# Altium PCB STM32_FFT.PcbDoc
Units mm, origin at the board's own origin, x right, y up, seen from the top; angles counter-clockwise.
Board outline 99.06 x 50.8 mm, 2 copper layers (Top Layer, Bottom Layer); 63 components, 49 nets, 246 pads, 64 vias.
Unrouted connection lines stored in the file: 2.
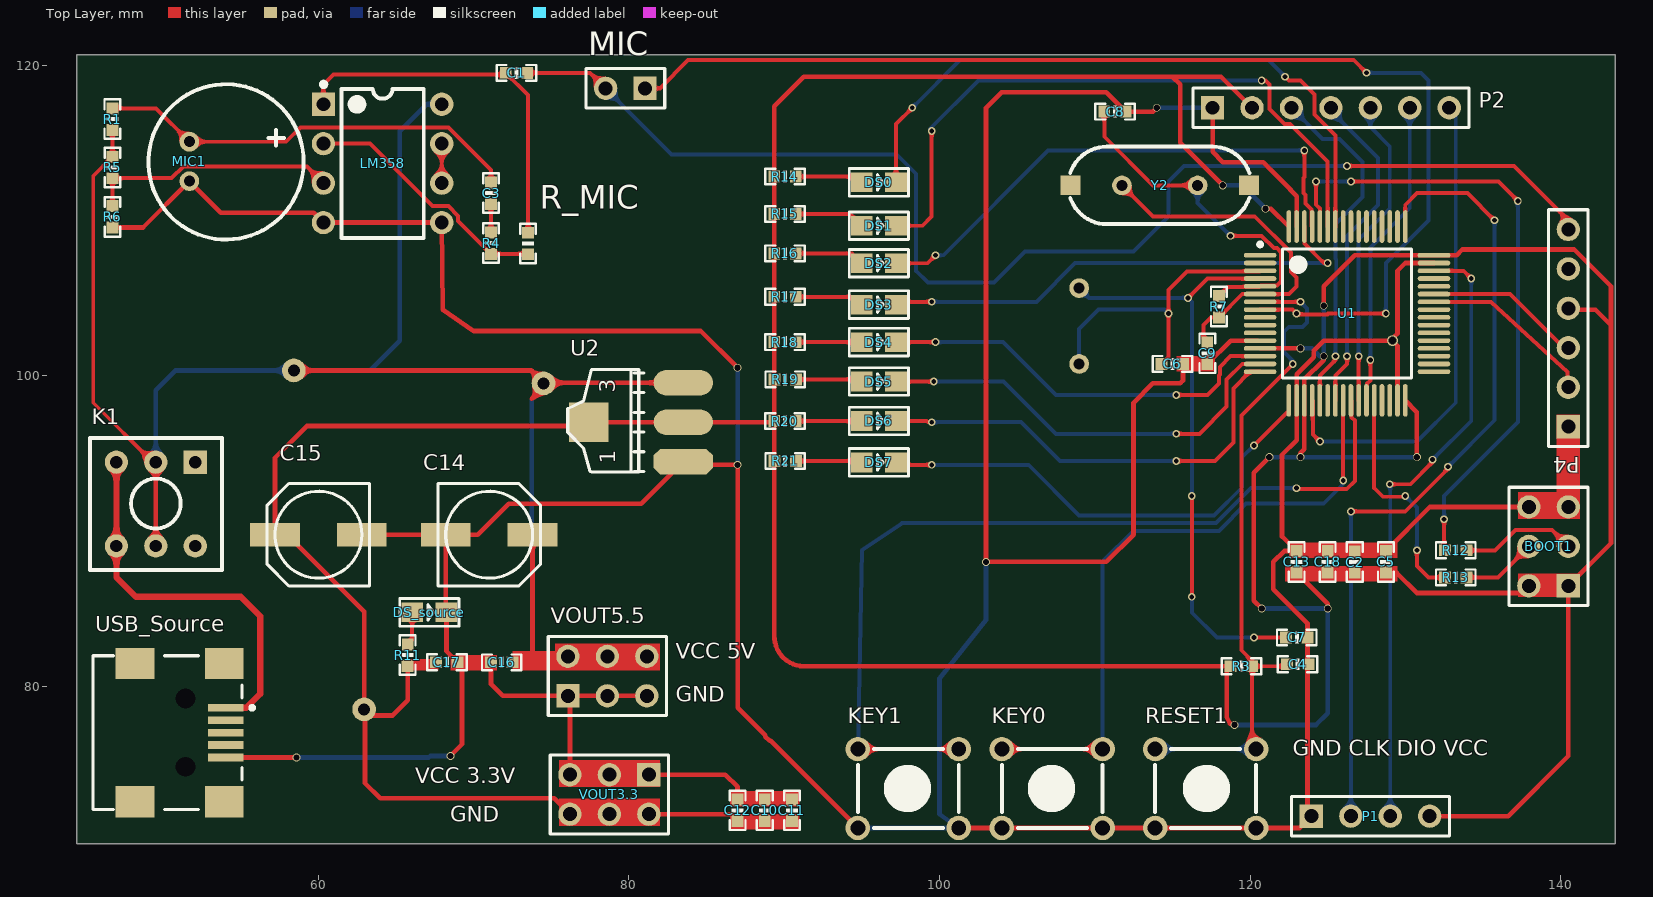
[diagram p0: Top Layer view]
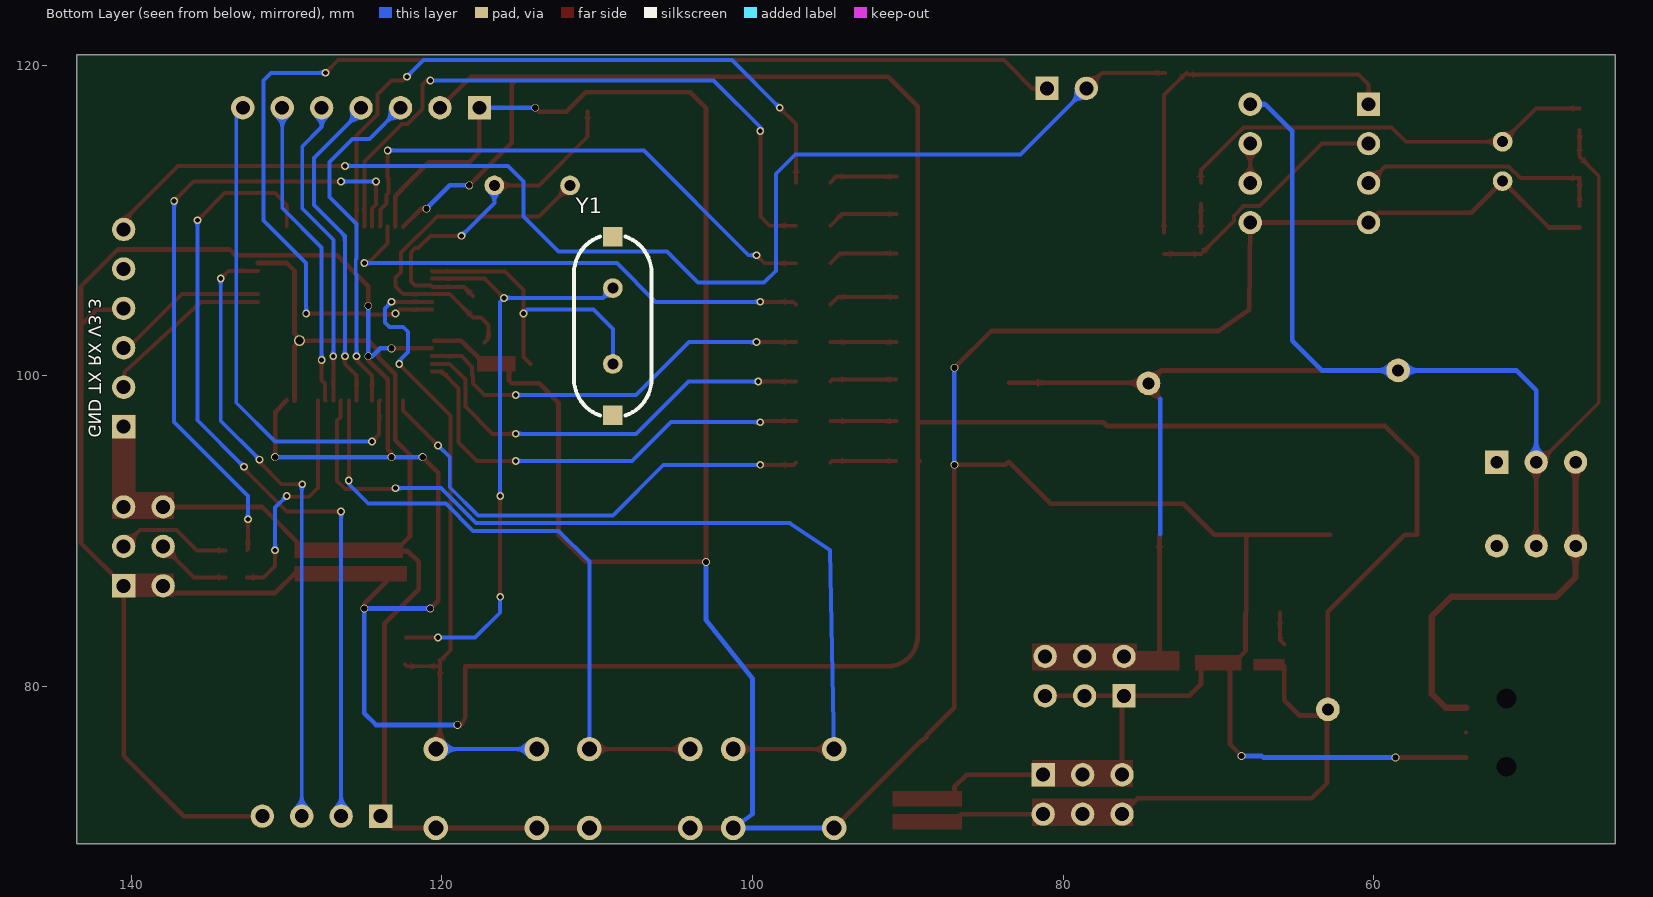
[diagram p1: Bottom Layer view, seen from below]

## Layer stack, top to bottom
Top Solder: solder mask 0.0102, Solder Resist, Dk 3.5
Top Layer: signal copper 0.0356
Dielectric 1: dielectric 0.32, FR-4, Dk 4.8
Bottom Layer: signal copper 0.0356
Bottom Solder: solder mask 0.0102, Solder Resist, Dk 3.5

## Board outline
44.45,69.85 143.51,69.85 143.51,120.65 44.45,120.65

## Design rules (kind name [scope] priority, off if disabled: settings)
Clearance [All] p1: gap=0.178
PolygonConnect [All] p1: connectstyle=Relief reliefconductorwidth=0.254 reliefentries=4 polygonreliefangle="90 Angle" airgapwidth=0.254
RoutingVias [All] p1: holewidth=0.711 width=1.27 viastyle="Through Hole" minholewidth=0.711 minwidth=1.27 maxholewidth=0.711 maxwidth=1.27
SolderMaskExpansion [All] p1: expansion=0.102
Width [All] p1: maxlimit=0.5 minlimit=0.254 preferedwidth=0.254
30 further rules are at their usual default settings.

## Components (designator, comment, footprint, x,y, rotation, side; value= is the part's Value field where it differs from the comment)
BOOT1 "VCC5" HDR2X3 140.5,86.46 r90 top
C1 "4.7uf" 0603P 72.75,119.5 r0 top
C2 "104" 0603P 126.75,88 r270 top
C3 "104" 0603P 71.12,111.76 r270 top
C4 "104" 0603P 123.063,81.407 r0 top
C5 "104" 0603P 128.75,88 r90 top
C6 "104" 0603P 115,100.75 r180 top
C7 "104" 0603P 123.012,83.133 r180 top
C8 "22" 0603P 111.314,117 r180 top
C9 "22" 0603P 117.25,101.436 r90 top
C10 "10uF" 0603P 88.75,72 r90 top
C11 "104" 0603P 90.5,72 r90 top
C12 "104" 0603P 87,72 r90 top
C13 "104" 0603P 123,88 r90 top
C14 "220uF" CC6.56.5 71,89.75 r180 top
C15 "220uF" CC6.56.5 60,89.75 r0 top
C16 "104" 0603P 71.806,81.534 r0 top
C17 "104" 0603P 68.275,81.534 r180 top
C18 "104" 0603P 125,88 r90 top
DS0 "LED1" SMDLED 94.987,112.445 r0 top
DS1 "LED1" SMDLED 94.987,109.651 r0 top
DS2 "LED1" SMDLED 94.987,107.238 r0 top
DS3 "LED1" SMDLED 94.987,104.571 r0 top
DS4 "LED1" SMDLED 94.987,102.158 r0 top
DS5 "LED1" SMDLED 94.987,99.618 r0 top
DS6 "LED1" SMDLED 94.987,97.078 r0 top
DS7 "LED1" SMDLED 94.987,94.411 r0 top
DS_source "LED1" SMDLED 66.039,84.752 r0 top
K1 "BUTTON" BTN8.5*8.5 52.07,94.427 r270 top
KEY0 "KEY_M" KEY_M 110.513,70.866 r180 top
KEY1 "KEY_M" KEY_M 101.242,70.866 r180 top
LM358 "LM358" LC-DIP-8 64.135,113.665 r0 top
MIC "MIC" HDR1X2 81.04,118.5 r180 top
MIC1 "MIC" MIC 51.682,115.073 r270 top
P1 "Header 4" HDR1X4 123.952,71.628 r0 top
P2 "Header 7" HDR1X7 117.59,117.25 r0 top
P4 "Header 6" HDR1X6 140.5,96.71 r90 top
R1 "10K" 0603P 46.738,116.523 r270 top
R3 "10K" 0603P 119.444,81.278 r180 top
R4 "1K" 0603P 71.12,108.534 r270 top
R5 "10K" 0603P 46.738,113.398 r90 top
R6 "10K" 0603P 46.738,110.223 r90 top
R7 "1M" 0603P 118.002,104.449 r270 top
R11 "1.5K" 0603P 65.75,82 r270 top
R12 "1.5K（10K）" 0603P 133.25,88.75 r0 top
R13 "1.5K（10K）" 0603P 133.25,87 r180 top
R14 "1.5K" 0603P 90.055,112.818 r180 top
R15 "1.5K" 0603P 90.055,110.407 r180 top
R16 "1.5K" 0603P 90.055,107.867 r180 top
R17 "1.5K" 0603P 90.055,105.073 r180 top
R18 "1.5K" 0603P 90.055,102.152 r180 top
R19 "1.5K" 0603P 90.064,99.75 r180 top
R20 "1.5K" 0603P 90.055,97.072 r180 top
R21 "1.5K" 0603P 90.064,94.5 r180 top
R_MIC "40K" 0603P 73.5,108.5 r90 top
RESET1 "KEY_M" KEY_M 113.896,75.946 r0 top
U1 "STM32F103RCT6" STM-LQFP64_M 126.25,104 r0 top
U2 "AMS1117-3.3" AMS1117 83.498,94.459 r90 top
USB_Source "USB" USB/SM0.8-6H5 46.185,77.003 r180 top
VOUT3.3 "VCC3.3" HDR2X3 81.28,74.295 r180 top
VOUT5.5 "VCC5" HDR2X3 76.073,79.375 r0 top
Y1 "32.768K" XTAL_US 109,105.63 r270 bottom
Y2 "8MHz" XTAL_US 111.75,112.25 r0 top

## Footprints (in the part's own frame and the unit in brackets; to place one, negate y for a bottom-side part, rotate by r counter-clockwise, add the part's x,y. Pads: shape width x height; smd on the part's side, far side on the other; paste and mask are expansions set on the pad)
0603P [mil]
  rect 30x30 smd: 1(-27,0) 2(27.5,-0.06)
  silkscreen extent -50,-20 50,20
AMS1117 [mil]
  oct 65x150 smd: 1(0.03,-0.06)
  oval 65x150 smd: 2(100.03,-0.06) 3(200.03,-0.06)
  rect 100x100 smd: 4(100.03,239.94)
  silkscreen extent -26,100 234,293
BTN8.5*8.5 [mm]
  rect 1.5x1.5 hole 0.8: 1(0,0)
  round 1.5 hole 0.8: 2(0,-2.54) 3(0,-5.08) 4(5.4,-5.08) 5(5.4,-2.54) 6(5.4,0)
  silkscreen extent -1.55,-6.79 6.95,1.71
CC6.56.5 [mm]
  rect 3.2x1.5 smd: 1(-2.794,0) 2(2.8,0)
  silkscreen extent -3.3,-3.3 3.3,3.3
HDR1X2 [mm]
  rect 1.5x1.5 hole 0.9: 1(0,0)
  round 1.5 hole 0.9: 2(2.54,0)
  silkscreen extent -1.27,-1.27 3.81,1.27
HDR1X4 [mm]
  rect 1.5x1.5 hole 0.9: 1(0,0)
  round 1.5 hole 0.9: 2(2.54,0) 3(5.08,0) 4(7.62,0)
  silkscreen extent -1.27,-1.27 8.89,1.27
HDR1X6 [mm]
  rect 1.5x1.5 hole 0.9: 1(0,0)
  round 1.5 hole 0.9: 2(2.54,0) 3(5.08,0) 4(7.62,0) 5(10.16,0) 6(12.7,0)
  silkscreen extent -1.27,-1.27 13.97,1.27
HDR1X7 [mm] "Connector; Header; 7 Position"
  rect 1.5x1.5 hole 0.9: 1(0,0)
  round 1.5 hole 0.9: 2(2.54,0) 3(5.08,0) 4(7.62,0) 5(10.16,0) 6(12.7,0) 7(15.24,0)
  silkscreen extent -1.27,-1.27 16.51,1.27
HDR2X3 [mm]
  rect 1.5x1.5 hole 0.9: 1(0,0)
  round 1.5 hole 0.9: 2(0,2.54) 3(2.54,0) 4(2.54,2.54) 5(5.08,0) 6(5.08,2.54)
  silkscreen extent -1.27,-1.27 6.35,3.81
KEY_M [mil]
  round 62 hole 38: 1(0,0) 1(255.91,0) 2(0,-200) 2(255.91,-200)
  silkscreen extent 0,-200 255,0
LC-DIP-8 [mm]
  rect 1.5x1.5 hole 0.9: 1(-3.81,3.81)
  round 1.5 hole 0.9: 2(-3.81,1.27) 3(-3.81,-1.27) 4(-3.81,-3.81) 5(3.81,-3.81) 6(3.81,-1.27) 7(3.81,1.27) 8(3.81,3.81)
  silkscreen extent -3.95,-4.8 2.65,5.24, body extent -3.93,-5.46 3.94,5.46, height 5.08
MIC [mil]
  round 50 hole 28: 1(0.42,0.29) 2(100.42,0.29)
  silkscreen extent -145,-103 248,290
SMDLED [mm]
  rect 1.4x1.27 smd: 1(0.001,-0.002) 2(2.211,-0.002)
  silkscreen extent -0.8,-0.89 3.01,0.89
STM-LQFP64_M [mm] "Thin QFP, 64-Leads, Body 10x10mm, Pitch 0.5mm, IPC Low Density"
  oval 2.1x0.3 smd: 1(-5.6,3.75) 2(-5.6,3.25) 3(-5.6,2.75) 4(-5.6,2.25) 5(-5.6,1.75) 6(-5.6,1.25) 7(-5.6,0.75) 8(-5.6,0.25) 9(-5.6,-0.25) 10(-5.6,-0.75) 11(-5.6,-1.25) 12(-5.6,-1.75) 13(-5.6,-2.25) 14(-5.6,-2.75) 15(-5.6,-3.25) 16(-5.6,-3.75) 33(5.6,-3.75) 34(5.6,-3.25) 35(5.6,-2.75) 36(5.6,-2.25) 37(5.6,-1.75) 38(5.6,-1.25) 39(5.6,-0.75) 40(5.6,-0.25) 41(5.6,0.25) 42(5.6,0.75) 43(5.6,1.25) 44(5.6,1.75) 45(5.6,2.25) 46(5.6,2.75) 47(5.6,3.25) 48(5.6,3.75)
  oval 0.3x2.1 smd: 17(-3.75,-5.6) 18(-3.25,-5.6) 19(-2.75,-5.6) 20(-2.25,-5.6) 21(-1.75,-5.6) 22(-1.25,-5.6) 23(-0.75,-5.6) 24(-0.25,-5.6) 25(0.25,-5.6) 26(0.75,-5.6) 27(1.25,-5.6) 28(1.75,-5.6) 29(2.25,-5.6) 30(2.75,-5.6) 31(3.25,-5.6) 32(3.75,-5.6) 49(3.75,5.6) 50(3.25,5.6) 51(2.75,5.6) 52(2.25,5.6) 53(1.75,5.6) 54(1.25,5.6) 55(0.75,5.6) 56(0.25,5.6) 57(-0.25,5.6) 58(-0.75,5.6) 59(-1.25,5.6) 60(-1.75,5.6) 61(-2.25,5.6) 62(-2.75,5.6) 63(-3.25,5.6) 64(-3.75,5.6)
  silkscreen extent -5.72,-4.15 4.15,4.57, body extent -5,-5 5,5, height 1.6
USB/SM0.8-6H5 [mm]
  rect 2.3x0.5 smd: 1(-7.85,-1.6) 2(-7.85,-0.8) 3(-7.85,0) 4(-7.85,0.8) 5(-7.85,1.6)
  rect 2.5x2 smd: 6(-7.75,4.45) 7(-1.996,4.45) 8(-7.75,-4.45) 9(-1.996,-4.45)
  round 0.6 hole 1.27 unplated: MH1(-5.25,2.2) MH2(-5.25,-2.2)
  silkscreen extent -9.68,-4.95 0.7,4.95
XTAL_US [mil]
  round 50 hole 28: 1(0,0) 2(192.13,0)
  rect 50x50 smd: ""(-130.32,0) ""(322.44,0)
  silkscreen extent -131,-98 323,98

## Part data
BOOT1 VOUT3.3 VOUT5.5: library part "Header 3X2", "Header, 3-Pin, Dual row"
C1 C2 C3 C4 C5 C6 C7 C8 C9 C10 C11 C12 C13 C16 C17 C18: library part C
C14 C15: library part CAP
DS0 DS1 DS2 DS3 DS4 DS5 DS6 DS7 DS_source: library part LED2, "Typical RED, GREEN, YELLOW, AMBER GaAs LED"
MIC: library part "Header 2", "Header, 2-Pin"
P1: "Header, 4-Pin"
P2: "Header, 7-Pin"
P4: "Header, 6-Pin"
R1 R3 R4 R5 R6 R7 R11 R12 R13 R14 R15 R16 R17 R18 R19 R20 R21 R_MIC: library part R
U1: library part STM32F103RDT6
U2: library part AMS1117
USB_Source: library part USB5
Y1 Y2: library part XTAL, "Crystal Oscillator"

## Free pads (board coordinates)
  round 1.524 hole 0.762: 4(58.42,100.33) 6(74.5,99.5) 7(62.947,78.5)
  round 0.7 hole 0.511: 10(129.18,102.25)

## Via types
v1: diameter 0.5, hole 0.311, Top Layer to Bottom Layer, tented both sides, 45 vias
v2: diameter 0.5, hole 0.411, Top Layer to Bottom Layer, tented both sides, 11 vias
v3: diameter 0.5, hole 0.4, Top Layer to Bottom Layer, tented both sides, 6 vias
v4: diameter 0.5, hole 0.311, Top Layer to Bottom Layer, 2 vias

## Nets (pads, with @x,y where several pads share a name; then routed paths per layer and width w, separated by ;. In a path a pad name is that pad's centre, name@x,y a point inside that pad or via, vN(x,y) a via of type N, cw(c..) or ccw(c..) an arc to the next point about the centre after c; other vN are vias at no path point)
BOOT0: R12.1 U1.60 | length 41
  Top Layer w0.254: v1(124.25,112.5) 124.25,111.004 124.5,110.754 U1.60 ; v1(126.5,112.5) 136,112.5 v1(137.25,111.25) ; v1(132.5,90.75) 132.5,88.814 R12.1
  Bottom Layer w0.254: v1(124.25,112.5) v1(126.5,112.5) ; v1(132.5,90.75) 132.5,92.25 137.25,97 v1(137.25,111.25)
BOOT1: R13.2 U1.28 | length 14.8
  Top Layer w0.254: U1.28 128,92.75 128.555,92.195 129.945,92.195 v1(130,92.25) ; v1(130.75,88.75) 130.75,87.75 131.498,87.002 R13.2
  Bottom Layer w0.254: v1(130,92.25) 130.75,91.5 v1(130.75,88.75)
GND: BOOT1.5 BOOT1.6 C2.1 C4.2 C5.2 C6.1 C7.1 C8.1 C9.1 C10.2 C11.2 C12.2 C13.2 C14.2 C15.2 C16.1 C17.1 C18.2 DS_source.2 KEY0.1 KEY1.1 LM358.4 LM358.5 MIC1.2 P1.1 P2.1 P4.1 pad.10 R6.1 RESET1.2 U1.12 U1.18 U1.31 U1.47 U1.63 U2.1 USB_Source.5 VOUT3.3.1 VOUT3.3.3 VOUT3.3.5 VOUT5.5.1 VOUT5.5.3 VOUT5.5.5 | length 353.8
  Top Layer w0.3: R6.1 48.705,109.538 MIC1.2 53.721,110.49 59.69,110.49 LM358.4 LM358.5 68,104.25 70,102.87 84.63,102.87 v3(87,100.5) ; USB_Source.5 v3(58.597,75.403) ; C15.2 C14.2 ; v3(68.5,75.5) 69.25,76.25 69.25,81.245 C17.1 68.25,82.245 DS_source.2 68.2,84.8 C14.2 ; C16.1 71.12,80.13 71.875,79.375 VOUT5.5.1 ; VOUT3.3.5 76.2,79.248 VOUT5.5.1 ; VOUT5.5.5 VOUT5.5.3 VOUT5.5.1 ; VOUT3.3.1 86.205,74.295 86.995,73.505 86.995,72.705 C12.2 ; KEY1.1@94.742,70.866 89.133,76.475 89.059,76.475 88.784,76.75 88.784,76.824 87,78.608 v3(87,94.25) 83.71,94.25 U2.1 80.79,91.75 72.25,91.75 70.25,89.75 C14.2 ; KEY1.1@101.242,70.866 104.013,70.866 110.513,70.866 113.896,70.866 120.396,70.866 123.19,70.866 P1.1 123.698,71.882 C4.2@123.698,81.405 ; v3(114,117.25) 113.75,117 C8.1 110.75,118.25 104,118.25 103,117.25 v3(103,88) 110.75,88 112.5,89.75 112.5,98.25 113.75,99.5 115.5,99.5 115.686,99.686 C6.1 ; C9.1 118.75,102.25 U1.12@120.5,102.25 ; P2.1 117.59,114.41 118.25,113.75 120.861,113.75 122.605,112.005 122.605,111.955 123,111.56 U1.63 ; C4.2@123.698,81.469 C7.1 123.698,84.052 121.5,86.25 121.5,88 122.199,88.699 C13.2 122.06,89.64 122.06,94.889 123,95.829 U1.18 123,100.079 124.112,101.191 124.112,101.612 124.75,102.25 pad.10 129.5,101.93 U1.31 ; C5.2 131.593,91.54 BOOT1.6 ; pad.10@129.335,102.545 129.5,102.71 129.5,106.75 130,107.25 U1.47
  Bottom Layer w0.3: v3(58.597,75.403) 67.097,75.403 67.194,75.5 v3(68.5,75.5) ; v3(87,94.25) v3(87,100.5) ; KEY1.1@94.742,70.866 101.242,70.866 100,71.75 100,80.5 103,84.25 v3(103,88) ; v3(114,117.25) P2.1
KEY0: KEY0.2 U1.24 | length 41.5
  Top Layer w0.254: KEY0.2@104.013,75.946 KEY0.2@110.513,75.946 ; v1(126,93.25) U1.24
  Bottom Layer w0.254: KEY0.2@110.513,75.946 110.513,88.013 112.5,90 118,90 119.75,91.75 124.75,91.75 126,93 v1(126,93.25)
KEY1: KEY1.2 U1.25 | length 58
  Top Layer w0.254: KEY1.2@94.742,75.946 KEY1.2@101.242,75.946 ; v1(123,92.75) 123.055,92.695 126.23,92.695 126.75,93.215 126.75,97.107 126.545,97.312 126.545,98.355 U1.25
  Bottom Layer w0.254: KEY1.2@94.742,75.946 95,88.75 97.6,90.5 117.8,90.5 120.05,92.75 v1(123,92.75)
LED0: DS0.2 U1.58 | length 42.4
  Top Layer w0.254: DS0.2 97.198,116.198 v1(98.25,117.25) ; v1(122.25,119.25) 122.5,119 123.25,119 124.155,118.095 124.155,116.813 125.5,115.468 U1.58
  Bottom Layer w0.254: v1(98.25,117.25) 101.317,120.317 121.183,120.317 v1(122.25,119.25)
LED1: DS1.2 U1.59 | length 42.2
  Top Layer w0.254: DS1.2 98.899,109.649 99.5,110.25 v1(99.5,115.75) ; v1(120.75,119) 121,119 121.25,118.75 121.25,117.178 122.233,116.195 122.589,116.195 125,113.785 U1.59
  Bottom Layer w0.254: v1@99.375,115.875 102.5,119 v1(120.75,119)
LED2: DS2.2 U1.61 | length 34.5
  Top Layer w0.254: DS2.2 99.236,107.236 v1(99.75,107.75) ; v1(123.5,114.5) 123.5,112.785 123.445,112.73 123.445,111.758 123.568,111.635 123.568,111.075 123.955,110.688 123.955,109.645 U1.61
  Bottom Layer w0.254: v1(99.75,107.75) 100.25,107.75 107,114.5 v1(123.5,114.5)
LED3: DS3.2 U1.62 | length 32
  Top Layer w0.254: DS3.2 97.379,104.75 v1(99.5,104.75) ; U1.62 123.5,108.5 124.75,107.25 v1(125,107.25)
  Bottom Layer w0.254: v1(99.5,104.75) 106.24,104.75 108.74,107.25 v1(125,107.25)
LED4: DS4.2 U1.14 | length 26.5
  Top Layer w0.254: DS4.2 v1(99.75,102.156) ; v1(115.25,98.75) 117.25,98.75 118,99.5 118,100.014 118.055,100.069 118.055,100.555 118.75,101.25 U1.14
  Bottom Layer w0.254: v1(99.75,102.156) 104.094,102.156 107.5,98.75 v1(115.25,98.75)
LED5: DS5.2 U1.15 | length 27.7
  Top Layer w0.254: DS5.2 v1(99.634,99.616) ; v1(115.25,96.25) 116.75,96.25 118.5,98 118.5,99.75 119.5,100.75 U1.15
  Bottom Layer w0.254: v1(99.634,99.616) 104.134,99.616 107.5,96.25 v1(115.25,96.25)
LED6: DS6.2 U1.16 | length 28.7
  Top Layer w0.254: DS6.2 99.174,97.076 v1@99.25,97 ; v1(115.25,94.5) 117.75,94.5 118.932,95.682 118.932,99.182 120,100.25 U1.16
  Bottom Layer w0.254: v1(99.5,97) 105.25,97 107.75,94.5 v1(115.25,94.5)
LED7: DS7.2 U1.17 | length 31.3
  Top Layer w0.254: DS7.2 97.357,94.25 v1(99.5,94.25) ; v1(120.25,95.5) 122.5,97.75 U1.17
  Bottom Layer w0.254: v1(99.5,94.25) 105.75,94.25 109,91 117.69,91 119.5,92.81 119.5,94.75 v1(120.25,95.5)
MIC: C1.2 MIC.2 P4.6 | length 82.8
  Top Layer w0.254: C1.2 77.502,119.498 MIC.2 ; v1(126.25,113.5) 137,113.5 140.5,110 P4.6
  Bottom Layer w0.254: MIC.2 82.75,114.25 97.25,114.25 98.5,113 98.5,106.75 99.25,106 103.5,106 105.5,108 112.5,108 114.75,110.25 114.75,112.5 115.75,113.5 v1(126.25,113.5)
"MIC OUT": MIC.1 U1.8 | length 75.9
  Top Layer w0.254: MIC.1 82,118.5 83.817,120.317 126.683,120.317 v1(127.5,119.5) ; U1.8 122.75,104.25 v1(123,104) 123.055,103.945 124.98,103.945 125.035,104 128.5,104
  Bottom Layer w0.254: v1(127.5,119.5) 131,119.5 131.5,119 131.5,110 128.75,107.25 v1(128.75,104)
NetBOOT1_3: BOOT1.3 R12.2 | length 7.5
  Top Layer w0.254: R12.2 135.779,88.748 137.085,90.055 139.445,90.055 BOOT1.3
NetBOOT1_4: BOOT1.4 R13.1 | length 4.9
  Top Layer w0.254: R13.1 135.96,87 BOOT1.4
NetC1_1: C1.1 LM358.1 R_MIC.2 | length 24
  Top Layer w0.254: LM358.1 60.325,118.745 60.96,119.38 C1.1@71.944,119.38 ; C1.1 73.502,118.063 R_MIC.2
NetC3_1: C3.1 MIC1.1 R1.1 | length 27.6
  Top Layer w0.254: R1.1 49.543,117.208 MIC1.1 57.912,115.062 58.84,115.99 68.382,115.99 71.12,113.252 C3.1
NetC3_2: C3.2 R4.1 | length 1.8
  Top Layer w0.254: C3.2 71.118,109.222 R4.1
NetC6_2: C6.2 U1.3 Y1.2 | length 20
  Top Layer w0.254: C6.2 114.75,101.2 v1(114.75,104) 114.75,105.5 115.955,106.705 120.605,106.705 U1.3
  Bottom Layer w0.254: Y1.2 109,103 110.25,104.25 114.5,104.25 v1(114.75,104)
NetC7_2: C7.2 U1.4 Y1.1 | length 39.5
  Top Layer w0.254: v1(116,105) 117.25,106.25 U1.4 ; v1(116.25,85.75) v1(116.25,92.25) ; v1(120.25,83.134) C7.2
  Bottom Layer w0.254: Y1.1 109.63,105 v1(116,105) 116.25,104.75 v1(116.25,92.25) ; v1(116.25,85.75) 116.25,84.75 117.866,83.134 v1(120.25,83.134)
NetC8_2: C8.2 R7.1 U1.5 Y2.2 | length 23
  Top Layer w0.254: C8.2 110.616,115.384 113.75,112.25 Y2.2 ; R7.1 118.572,105.705 120.605,105.705 U1.5 120.695,105.795 121.738,105.795 122.005,106.062 122.005,107.938 121.738,108.205 121.545,108.205 120.75,109 v1(118.75,109)
  Bottom Layer w0.254: Y2.2 116.63,111.12 v1(118.75,109)
NetC9_2: C9.2 R7.2 U1.6 Y2.1 | length 23.3
  Top Layer w0.254: Y2.1 113.75,110.25 120.304,110.25 122.636,107.917 122.636,106.674 123,106.31 123,105.75 122.5,105.25 U1.6 119.5,105.25 R7.2 117.5,103.75 117,103.25 117,102.386 C9.2
NetDS0_1: DS0.1 R14.1 | length 4.4
  Top Layer w0.254: R14.1 94.613,112.818 DS0.1
NetDS1_1: DS1.1 R15.1 | length 4.6
  Top Layer w0.254: R15.1 94.23,110.407 DS1.1
NetDS2_1: DS2.1 R16.1 | length 4.5
  Top Layer w0.254: R16.1 94.357,107.867 DS2.1
NetDS3_1: DS3.1 R17.1 | length 4.5
  Top Layer w0.254: R17.1 94.484,105.073 DS3.1
NetDS4_1: DS4.1 R18.1 | length 4.2
  Top Layer w0.254: R18.1 90.745,102.156 DS4.1
NetDS5_1: DS5.1 R19.1 | length 4.3
  Top Layer w0.254: R19.1 94.854,99.75 DS5.1
NetDS6_1: DS6.1 R20.1 | length 4.2
  Top Layer w0.254: R20.1 94.984,97.072 DS6.1
NetDS7_1: DS7.1 R21.1 | length 4.3
  Top Layer w0.254: R21.1 94.897,94.5 DS7.1
NetDS_source_1: DS_source.1 R11.1 | length 2.2
  Top Layer w0.254: R11.1 66.04,82.976 DS_source.1
NetK1_3: K1.3 K1.4 USB_Source.1 | length 25.3
  Top Layer w0.4: K1.3 K1.4 46.99,87.01 48.25,85.75 55,85.75 56.25,84.5 56.25,79.5 55.353,78.603 USB_Source.1
NetLM358_2: LM358.2 R4.2 R_MIC.1 | length 16.3
  Top Layer w0.254: LM358.2 63.315,114.935 67.34,110.91 68.382,110.91 69,110.292 69,109.954 R4.2 73.479,107.836 R_MIC.1
NetLM358_3: LM358.3 R5.1 R6.2 | length 16.1
  Top Layer w0.254: R6.2 46.738,110.923 R5.1 50.55,112.713 51.3,113.462 59.258,113.462 LM358.3
NetLM358_6: LM358.6 LM358.7 | length 2.5
  Top Layer w0.254: LM358.6 LM358.7
PA4: P2.7 U1.20 | length 31.8
  Top Layer w0.254: U1.20 124.045,98.355 124.045,96.204 v1(124.5,95.75)
  Bottom Layer w0.254: v1(124.5,95.75) 130.75,95.75 133.25,98.25 133.25,116.83 P2.7
PA5: P2.3 U1.21 | length 22.6
  Top Layer w0.254: U1.21 124.5,100 125.5,101 v1(125.5,101.25)
  Bottom Layer w0.254: P2.3 124.67,115.25 125.75,115.25 127.25,113.75 127.25,111.5 125.5,109.75 125.5,107.534 125.555,107.48 125.555,106.52 125.5,106.466 v1(125.5,101.25)
PA7: P2.4 U1.23 | length 21.2
  Top Layer w0.254: U1.23 125.5,100 126.25,100.75 v1(126.25,101.25)
  Bottom Layer w0.254: P2.4 125.21,117.04 128.25,114 128.25,111 126.25,109 v1(126.25,101.25)
PB0: P2.5 U1.26 | length 20.2
  Top Layer w0.254: U1.26 v1(127,101.25)
  Bottom Layer w0.254: v1(127,101.25) 127,108.75 129,110.75 129,114.75 127.75,116 P2.5
PB1: P2.6 U1.27 | length 20
  Top Layer w0.254: U1.27 127.545,98.445 127.545,99.488 127.75,99.693 v1(127.75,101)
  Bottom Layer w0.254: v1(127.75,101) 127.75,108.25 130.29,110.79 P2.6
RESET: C4.1 R3.1 RESET1.1 U1.7 | length 43.6
  Top Layer w0.254: RESET1.1@120.396,75.946 120.129,76.213 R3.1 ; U1.7 v4(123.25,104.75) ; C4.1 122.249,81.278 R3.1 ; v4@122.82,100.82 119.44,97.44 119.44,82.31 120.129,81.621 R3.1
  Bottom Layer w0.254: RESET1.1@113.896,75.946 RESET1.1@120.396,75.946 ; v4(122.75,100.75) 122.75,100.965 122.186,101.53 122.186,102.825 122.496,103.135 123.385,103.135 123.68,103.43 123.68,104.32 v4(123.25,104.75)
SWCLK: P1.2 U1.49 | length 52.4
  Top Layer w0.254: v1(126.5,91.25) 130,91.25 132.75,94 v1(132.75,94.125) ; U1.49 130,111 130.75,111.75 134,111.75 v1(135.75,110)
  Bottom Layer w0.254: P1.2 126.492,91.242 v1(126.5,91.25) ; v1(132.75,94.125) 135.75,97.125 v1(135.75,110)
SWDIO: P1.3 U1.46 | length 40.2
  Top Layer w0.254: v1(129,93) 130.329,93 131.75,94.421 v1(131.75,94.585) ; U1.46 133.75,106.75 v1(134.25,106.25)
  Bottom Layer w0.254: v1(129,93) 129.032,92.968 P1.3 ; v1(131.75,94.585) 131.756,94.585 134.25,97.079 v1(134.25,106.25)
U1_RX: P4.3 U1.43 | length 10.1
  Top Layer w0.254: U1.43 136.5,105.25 136.75,105.25 140.21,101.79 P4.3
U1_TX: P4.2 U1.42 | length 11.8
  Top Layer w0.254: U1.42 135.523,104.75 140.458,100.226 P4.2 P4.2@140,99.25
VCC3.3: BOOT1.1 BOOT1.2 C2.2 C5.1 C10.1 C11.1 C12.1 C13.1 C15.1 C17.2 C18.1 P1.4 P2.2 P4.4 pad.7 R3.2 R11.2 R14.2 R15.2 R16.2 R17.2 R18.2 R19.2 R20.2 R21.2 U1.13 U1.19 U1.32 U1.48 U1.64 U2.2 U2.4 VOUT3.3.2 VOUT3.3.4 VOUT3.3.6 | length 333.3
  Top Layer w0.3: pad.7 62.947,84.803 58,89.75 C15.1 57.206,94.706 59.25,96.75 77.154,96.75 U2.4 U2.2 89.25,97 R20.2 ; R11.2 65.748,79.083 64.77,78.105 63.342,78.105 63,78.447 63,73.75 63.979,72.771 75.184,72.771 VOUT3.3.6 ; VOUT3.3.2 86.559,71.755 C12.1 ; R21.2@89.25,94.5 89.25,94.506 R21.2@89.25,94.502 ; R21.2@89.352,94.502 R20.2 ; 89.366,95.252 R21.2 89.366,83.25 ccw(c91.293,83.207) 91.25,81.28 118.495,81.28 118.495,78.01 118.705,77.596 v2(119,77.5) ; v2(118.25,112.25) 115.5,115 115.5,118.75 115,119.25 ; P2.2 118.13,119.25 115,119.25 ; U1.13 122.25,101.75 122.259,101.759 122.269,101.75 v2(123.25,101.75) ; v2(120.75,85) 120.25,85.5 120.25,93.75 v2(121.25,94.75) ; v2(121,110.75) 121.35,110.75 U1.64 ; C13.1 125,85.314 v2(125,85) ; v2(123.25,94.75) 123.25,95 123.5,95.25 U1.19 123.5,99.75 124.75,101 v2(124.75,101.25) ; v2(124.75,104.5) 124.75,105.75 126.75,107.75 U1.48 133.31,107.75 133.682,108.122 140.878,108.122 143.25,105.75 143.25,103.25 ; C5.1 129.436,87.314 130.75,86 137.5,86 BOOT1.2 ; U1.32 130.75,97.65 v2(130.75,94.75) ; P1.4 136.628,71.628 140.5,75.5 BOOT1.1 143.25,89.21 143.25,103.25 ; P4.4 140.58,104.25 142.25,104.25 143.25,103.25 ; R20.2 R19.2 R18.2 R17.2 R16.2 R15.2 R14.2 89.356,117.356 91.25,119.25 115,119.25
  Bottom Layer w0.3: v2(118.25,112.25) 119.5,112.25 v2(121,110.75) ; v2(119,77.5) 124.25,77.5 125,78.25 v2(125,85) v2(120.75,85) ; v2(121.25,94.75) v2(123.25,94.75) v2(130.75,94.75) ; v2(123.25,101.75) 123.981,101.75 123.991,101.759 124.5,101.25 v2(124.75,101.25) v2(124.75,104.5)
VCC5: C14.1 C16.2 K1.2 K1.5 LM358.8 pad.4 pad.6 R1.2 R5.2 U2.3 VOUT5.5.2 VOUT5.5.4 VOUT5.5.6 | length 111.9
  Top Layer w0.254: R1.2 46.736,114.1 R5.2 45.5,112.858 45.5,98.25 49.323,94.427 K1.2
  Top Layer w0.3: K1.5@49.53,88.72 K1.5 K1.2 ; pad.4 73.71,100.33 pad.6@74.5,99.54 ; LM358.8@67.945,117.299 LM358.8 ; 73.75,98.5 74.5,99.25 pad.6 pad.6@74.5,99.54 ; 73.794,81.5 C14.1 ; U2.3 pad.6@74.5,99.54
  Bottom Layer w0.3: K1.2 49.53,99.06 50.8,100.33 pad.4 63.33,100.33 65.25,102.25 65.25,115.75 66.975,117.475 LM358.8 ; 73.75,89.794 73.75,98.5
pads on no net: K1.1 K1.6 P4.5 U1.1 U1.2 U1.9 U1.10 U1.11 U1.22 U1.29 U1.30 U1.33 U1.34 U1.35 U1.36 U1.37 U1.38 U1.39 U1.40 U1.41 U1.44 U1.45 U1.50 U1.51 U1.52 U1.53 U1.54 U1.55 U1.56 U1.57 USB_Source.2 USB_Source.3 USB_Source.4 USB_Source.6 USB_Source.7 USB_Source.8 USB_Source.9 USB_Source.MH1 USB_Source.MH2 Y1. Y2.
copper on no net: | length 0
  Top Layer w0.254: 54.035,77.003 54.038,77

## Other copper
Top Layer:
  rectangle net VCC3.3: 137.25,85.75 141.25,87.25
  rectangle net GND: 137.25,90.75 141.25,92.5
  rectangle net VCC3.3: 122.25,86.75 129.5,87.75
  region net GND: 129.5,89.25 122.5,89.25 122.5,88.25 129.5,88.25
  rectangle net GND: 86.5,72.25 91,73.25
  rectangle net VCC3.3: 86.5,70.75 91,71.75
  rectangle net GND: 75.5,73.5 82,75.25
  rectangle net VCC3.3: 75.5,71 82,72.75
  rectangle net VCC5: 75.25,81 82,82.75
  rectangle net GND: 68.5,81 71.5,82
  rectangle net VCC5: 72.5,81 76.5,82.25
  rectangle net VCC3.3: 65.748,81 67.75,81.75
  rectangle net GND: 115.25,100.25 117.75,101.25
  rectangle net GND: 139.75,91 141.25,97.5

## Silkscreen, mask and mechanical layers (free items; w line width, h text height)
Top Overlay:
  text "VCC 5V" at 83,81.75 h1
  text "GND" at 83,79 h1
  text "GND CLK DIO VCC" at 122.75,75.5 h1
  text "VCC 3.3V" at 66.25,73.75 h1
  text "GND" at 68.5,71.25 h1
Bottom Overlay:
  text "GND TX RX V3.3" at 142.75,96 h0.8 r90

## Text inside footprints (layer, text, board x,y; h text height)
U2: Top Overlay "3" at 79.106,98.88 h1 r90; Top Overlay "1" at 79.106,94.308 h1 r90